# Altium PCB keyboard.PcbDoc
Units mm, origin at the board's own origin, x right, y up, seen from the top; angles counter-clockwise.
Board outline 152.4 x 101.6 mm, 2 copper layers (Top Layer, Bottom Layer); 13 components, 15 nets, 79 pads, 0 vias.
Unrouted connection lines stored in the file: 1.
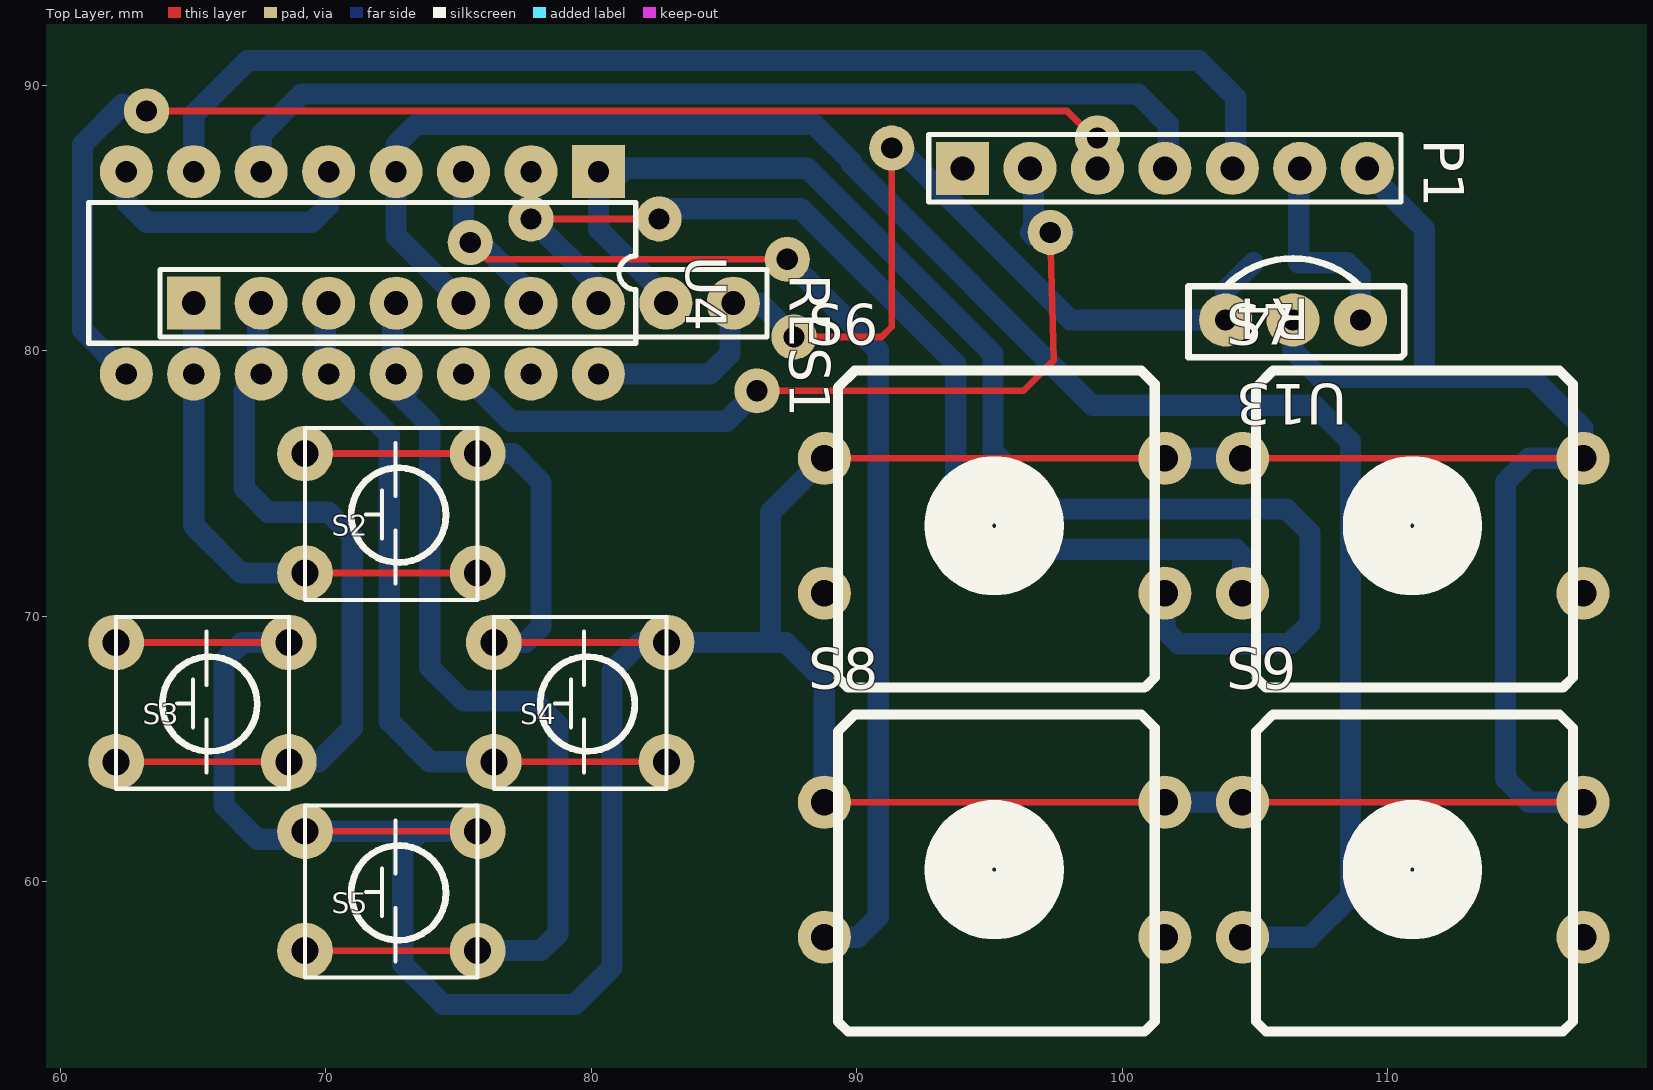
[diagram p0: Top Layer view]
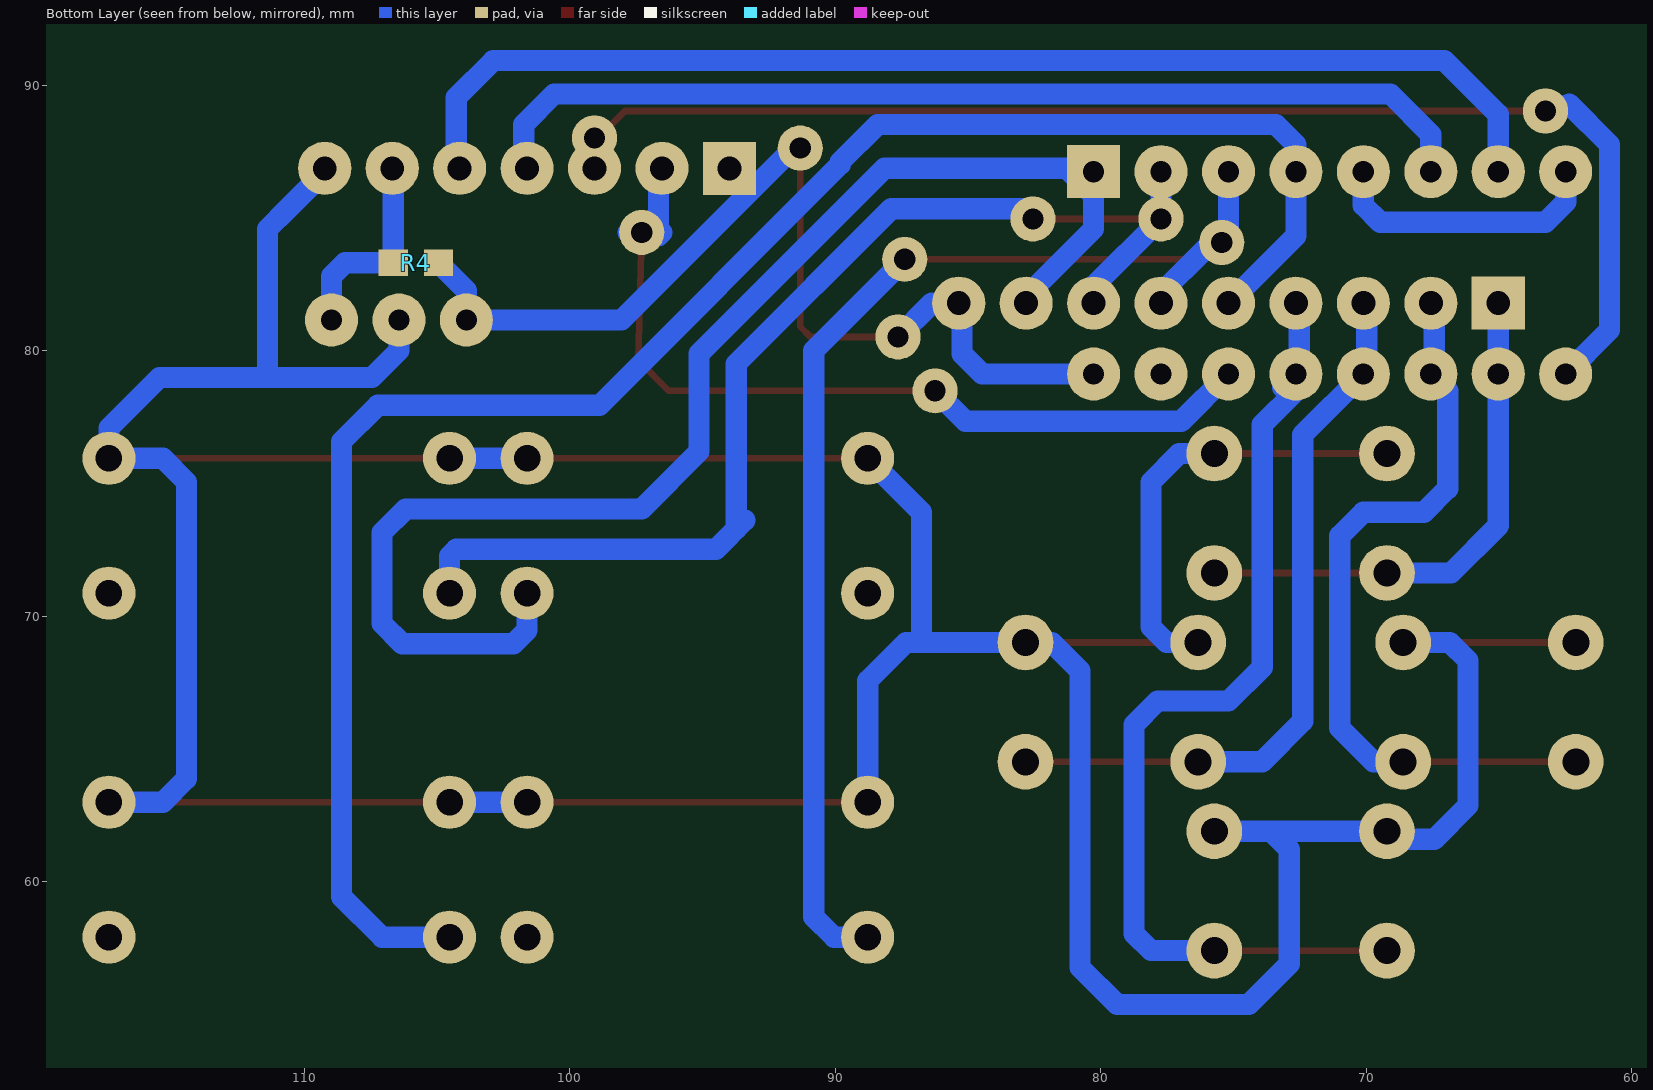
[diagram p1: Bottom Layer view, seen from below]

## Layer stack, top to bottom
Top Layer: signal copper 0.0356
Dielectric: dielectric 0.32, FR-4, Dk 4.8
Bottom Layer: signal copper 0.0356

## Board outline
25.4,25.4 177.8,25.4 177.8,127 25.4,127

## Design rules (kind name [scope] priority, off if disabled: settings)
Clearance [All] p1: gap=0.254
PolygonConnect [All] p1: connectstyle=Relief reliefconductorwidth=0.254 reliefentries=4 polygonreliefangle="90 Angle"
RoomDefinition keyboard [InComponentClass('keyboard')] p1: confinementstyle=ConfineIn formatcopy=TRUE lockcomponents=FALSE outline 178.943,24.384 181.991,24.384 181.991,45.212 178.943,45.212
RoutingVias [All] p1: holewidth=0.711 width=1.27 viastyle="Through Hole" minholewidth=0.711 minwidth=1.27 maxholewidth=0.711 maxwidth=1.27
SilkscreenOverComponentPads [All] p1: minsilkscreentomaskgap=0.254
SolderMaskExpansion [All] p1: expansion=0.102
TestPointUsage [All] p1: valid=0 allowmultiple=FALSE
Testpoint [All] p1: side=15 testpointundercomponent=TRUE minsize=1.016 maxsize=2.54 preferedsize=1.524 minholesize=0 maxholesize=1.016 preferedholesize=0.813 testpointgrid=0.025 style=1023 order=0123456789
Width [All] p1: maxlimit=1 minlimit=0.254 preferedwidth=0.254 toplayer_maxwidth=0.254 minimp=50.000000 maximp=50.000000 favimp=50.000000
23 further rules are at their usual default settings.

## Components (designator, comment, footprint, x,y, rotation, side; value= is the part's Value field where it differs from the comment)
P1 "Header 7" HDR1X7 93.98,86.868 r0 top
R4 "4.7K" 1608[0603] 105.791,83.312 r180 top
RES1 "Header 9" HDR1X9 65.024,81.788 r0 top
S2 "SW-PB" SW 69.215,71.628 r0 top (schematic designator S9)
S3 "SW-PB" SW 62.103,64.516 r0 top (schematic designator S9)
S4 "SW-PB" SW 76.327,64.516 r0 top (schematic designator S9)
S5 "SW-PB" SW 69.215,57.404 r0 top (schematic designator S9)
S6 "SW-PB" AN12 95.25,73.406 r0 top
S7 "SW-PB" AN12 110.998,73.406 r0 top
S8 "SW-PB" AN12 95.25,60.452 r0 top
S9 "SW-PB" AN12 110.998,60.452 r0 top
U4 "74LS148" DIP-16 71.374,82.931 r180 top
U13 "HS0038" HS0038 108.966,81.153 r180 top

## Footprints (in the part's own frame and the unit in brackets; to place one, negate y for a bottom-side part, rotate by r counter-clockwise, add the part's x,y. Pads: shape width x height; smd on the part's side, far side on the other; paste and mask are expansions set on the pad)
1608[0603] [mm] "Chip Capacitor; Body 1.6 x 0.8 mm (LxW typ)"
  rect 1.1x1 smd far side: 1(-0.85,0) 2(0.85,0)
AN12 [mm]
  round 2 hole 1: 2(-6.477,-2.54) 2(6.35,-2.54) 4(-6.477,2.54) 4(6.35,2.54)
  silkscreen extent -5.97,-6.1 5.97,5.84
DIP-16 [mm] "DIP; 16 Leads; Row Spacing 7.62 mm; Pitch 2.54 mm"
  rect 2x2 hole 0.8: 1(-8.89,-3.81)
  round 2 hole 0.8: 2(-6.35,-3.81) 3(-3.81,-3.81) 4(-1.27,-3.81) 5(1.27,-3.81) 6(3.81,-3.81) 7(6.35,-3.81) 8(8.89,-3.81) 9(8.89,3.81) 10(6.35,3.81) 11(3.81,3.81) 12(1.27,3.81) 13(-1.27,3.81) 14(-3.81,3.81) 15(-6.35,3.81) 16(-8.89,3.81)
  silkscreen extent -10.3,-2.65 10.3,2.65
HDR1X7 [mm] "Connector; Header; 7 Position"
  rect 2x2 hole 0.9: 1(0,0)
  round 2 hole 0.9: 2(2.54,0) 3(5.08,0) 4(7.62,0) 5(10.16,0) 6(12.7,0) 7(15.24,0)
  silkscreen extent -1.27,-1.27 16.51,1.27
HDR1X9 [mm] "Connector; Header; 9 Position"
  rect 2x2 hole 0.9: 1(0,0)
  round 2 hole 0.9: 2(2.54,0) 3(5.08,0) 4(7.62,0) 5(10.16,0) 6(12.7,0) 7(15.24,0) 8(17.78,0) 9(20.32,0)
  silkscreen extent -1.27,-1.27 21.59,1.27
HS0038 [mm]
  round 2 hole 0.8: 1(0,0) 2(2.54,0) 3(5.08,0)
  silkscreen extent -1.65,-2.32 6.48,1.4
SW [mm]
  round 2.1 hole 1.016: 2(0,0) 2(6.502,0) 4(0,4.496) 4(6.502,4.496)
  silkscreen extent 0,-1.02 6.5,5.46

## Part data
P1: "Header, 7-Pin"
R4: library part Res2, "Resistor"
RES1: "Header, 9-Pin"
S2 S3 S4 S5: "Switch"
U4: "8-Line to 3-Line Priority Encoder"

## Free pads (board coordinates)
  round 1.7 hole 0.8: 0(82.55,84.963) 1(77.724,84.963) 2(75.438,84.074) 4(87.376,83.439) 5(97.282,84.455) 7(86.233,78.486) 8(63.246,89.027) 9(99.06,88.011) 11(87.63,80.518) 12(91.313,87.63)

## Nets (pads, with @x,y where several pads share a name; then routed paths per layer and width w, separated by ;. In a path a pad name is that pad's centre, name@x,y a point inside that pad or via, vN(x,y) a via of type N, cw(c..) or ccw(c..) an arc to the next point about the centre after c; other vN are vias at no path point)
D0: P1.2 pad.5 pad.7 U4.14 | length 32.8
  Top Layer w0.254: pad.7 96.266,78.486 97.409,79.629 pad.5
  Bottom Layer w0.8: U4.14 76.962,77.343 85.09,77.343 pad.7 ; P1.2 96.647,86.741 96.647,84.328 96.52,84.455 pad.5@97.79,84.455
D1: P1.3 pad.8 pad.9 U4.9 | length 50.1
  Top Layer w0.254: pad.8 97.917,89.027 pad.9@99.187,87.757
  Bottom Layer w0.8: U4.9 60.83,80.775 60.83,87.76 62.351,89.281 pad.8 ; pad.9 99.187,87.884 P1.3@99.187,86.868
D2: P1.4 U4.6 | length 38.3
  Bottom Layer w0.8: U4.6 67.564,88.138 69.088,89.662 100.584,89.662 101.727,88.519 P1.4@101.727,86.868
D3: P1.5 U4.7 | length 45.5
  Bottom Layer w0.8: U4.7 65.024,88.9 67.056,90.932 102.87,90.932 104.267,89.535 P1.5@104.267,86.868
DGND: P1.7 S2.4 S3.4 S4.4 S5.4 S6.4 S7.4 S8.4 S9.4 U4.5 U4.8 U13.2 | length 210.3
  Top Layer w0.254: S3.4@62.103,69.012 S3.4@68.605,69.012 ; S5.4@69.215,61.9 S5.4@75.717,61.9 ; S2.4@69.215,76.124 S2.4@75.717,76.124 ; S4.4@76.327,69.012 S4.4@82.829,69.012 ; S8.4@88.773,62.992 S8.4@101.6,62.992 ; S6.4@88.773,75.946 S6.4@101.6,75.946 ; S9.4@104.521,62.992 S9.4@117.348,62.992 ; S7.4@104.521,75.946 S7.4@117.348,75.946
  Bottom Layer w0.8: U4.8 62.484,85.598 63.246,84.836 64.135,84.836 69.469,84.836 70.104,85.471 U4.5 ; S3.4@68.605,69.012 66.853,69.012 66.167,68.326 66.167,62.865 67.437,61.595 68.91,61.595 69.215,61.9 73.584,61.9 ; S5.4@75.717,61.9 73.584,61.9 ; S2.4@75.717,76.124 77.038,76.124 78.105,75.057 78.105,69.596 77.521,69.012 S4.4@76.327,69.012 ; S8.4@88.773,62.992 88.773,67.564 87.325,69.012 86.741,69.012 ; S6.4@88.773,75.946 86.741,73.914 86.741,69.012 ; S8.4@101.6,62.992 S9.4@104.521,62.992 ; S6.4@101.6,75.946 S7.4@104.521,75.946 ; U13.2 106.426,80.01 107.442,78.994 111.379,78.994 ; P1.7 109.22,86.741 110.617,85.344 111.379,84.582 111.379,78.994 ; S9.4@117.348,62.992 115.316,62.992 114.427,63.881 114.427,75.057 115.316,75.946 117.348,75.946 117.348,77.089 115.443,78.994 111.379,78.994 ; 73.584,61.9 72.898,61.214 72.898,56.896 74.422,55.372 79.375,55.372 80.772,56.769 80.772,67.945 81.839,69.012 82.829,69.012 86.741,69.012
NetRES1_1: RES1.1 S2.2 U4.10 | length 19.5
  Top Layer w0.254: S2.2@69.215,71.628 S2.2@75.717,71.628
  Bottom Layer w0.8: RES1.1@64.897,81.407 65.024,81.28 U4.10 65.024,73.406 66.802,71.628 S2.2@69.215,71.628
NetRES1_2: RES1.2 S3.2 U4.11 | length 29
  Top Layer w0.254: S3.2@62.103,64.516 S3.2@68.605,64.516
  Bottom Layer w0.8: S3.2@61.468,64.516 S3.2@62.103,64.516 ; RES1.2@67.437,81.407 67.437,79.248 U4.11 66.929,78.486 66.929,74.803 67.818,73.914 70.104,73.914 70.993,73.025 70.993,65.786 69.723,64.516 S3.2@68.605,64.516
NetRES1_3: RES1.3 S4.2 U4.12 | length 27.4
  Top Layer w0.254: S4.2@76.327,64.516 S4.2@82.829,64.516
  Bottom Layer w0.8: RES1.3@69.977,81.407 69.977,79.248 U4.12 72.39,76.835 72.39,66.04 73.914,64.516 S4.2@76.327,64.516
NetRES1_4: RES1.4 S5.2 U4.13 | length 38
  Top Layer w0.254: S5.2@69.215,57.404 S5.2@75.717,57.404
  Bottom Layer w0.8: RES1.4@72.517,81.407 72.517,79.248 U4.13 ; U4.13@73.152,78.613 U4.13 ; S5.2@75.717,57.404 78.105,57.404 78.74,58.039 78.74,65.913 77.851,66.802 75.184,66.802 73.914,68.072 73.914,77.216 72.644,78.486 U4.13
NetRES1_5: RES1.5 S9.2@104.521,57.912 U4.4 | length 70.1
  Bottom Layer w0.8: RES1.5 72.644,84.328 U4.4 72.644,87.757 73.406,88.519 88.392,88.519 89.809,87.102 89.809,87.007 98.876,77.94 107.226,77.94 108.585,76.581 108.585,59.436 107.061,57.912 S9.2@104.521,57.912
NetRES1_6: pad.2 pad.4 RES1.6 S8.2@88.773,57.912 U4.3 | length 47.1
  Top Layer w0.254: pad.2 76.073,83.439 pad.4
  Bottom Layer w0.8: pad.2@75.184,83.82 U4.3 ; pad.2 75.692,83.82 76.073,83.82 77.724,82.169 RES1.6 ; pad.4 90.805,80.01 90.805,58.674 90.043,57.912 S8.2@88.773,57.912
NetRES1_7: pad.0 pad.1 RES1.7 S7.2@104.521,70.866 U4.2 | length 45.5
  Top Layer w0.254: pad.1 pad.0
  Bottom Layer w0.8: U4.2 pad.1 80.264,82.423 RES1.7 ; pad.0@82.169,84.709 82.804,85.344 87.884,85.344 93.726,79.502 93.726,73.282 94.488,72.52 ; 93.392,73.616 94.488,72.52 ; S7.2@104.521,70.866 104.521,72.263 104.264,72.52 94.488,72.52
NetRES1_8: RES1.8 S6.2@101.6,70.866 U4.1 | length 51.6
  Bottom Layer w0.8: RES1.8@82.677,81.407 82.677,82.169 80.264,84.582 80.264,85.852 81.28,86.868 88.138,86.868 95.123,79.883 95.123,76.2 97.282,74.041 106.172,74.041 107.061,73.152 107.061,69.723 106.299,68.961 102.108,68.961 101.6,69.469 S6.2@101.6,70.866 ; RES1.8 RES1.8@82.804,82.042
REDIN: P1.6 R4.1 U13.1 | length 7.8
  Bottom Layer w0.8: P1.6 106.641,86.829 106.641,85.178 R4.1 108.458,83.312 108.966,82.804 U13.1
VCC3.3: P1.1 pad.11 pad.12 R4.2 RES1.9 U4.16 U13.3 | length 38
  Top Layer w0.254: pad.11 90.932,80.518 91.313,80.899 pad.12
  Bottom Layer w0.8: U4.16 84.455,79.121 85.217,79.883 RES1.9@85.217,81.407 ; RES1.9 86.36,81.788 pad.11 ; pad.12@91.567,87.884 91.567,87.63 98.044,81.153 U13.3 103.886,82.257 R4.2
pads on no net: S6.2@88.773,70.866 S7.2@117.348,70.866 S8.2@101.6,57.912 S9.2@117.348,57.912 U4.15